# Altium PCB MainBoard.PcbDoc (part 4 of 5)
Units mm, origin at the board's own origin, x right, y up, seen from the top; angles counter-clockwise.
Board outline 82.15 x 81.5 mm, 4 copper layers (Top Layer, GND Top, GND Bot, Bottom Layer), stack 1.57 mm thick; 116 components, 97 nets, 468 pads, 3117 vias.
Unrouted connection lines stored in the file: 5.
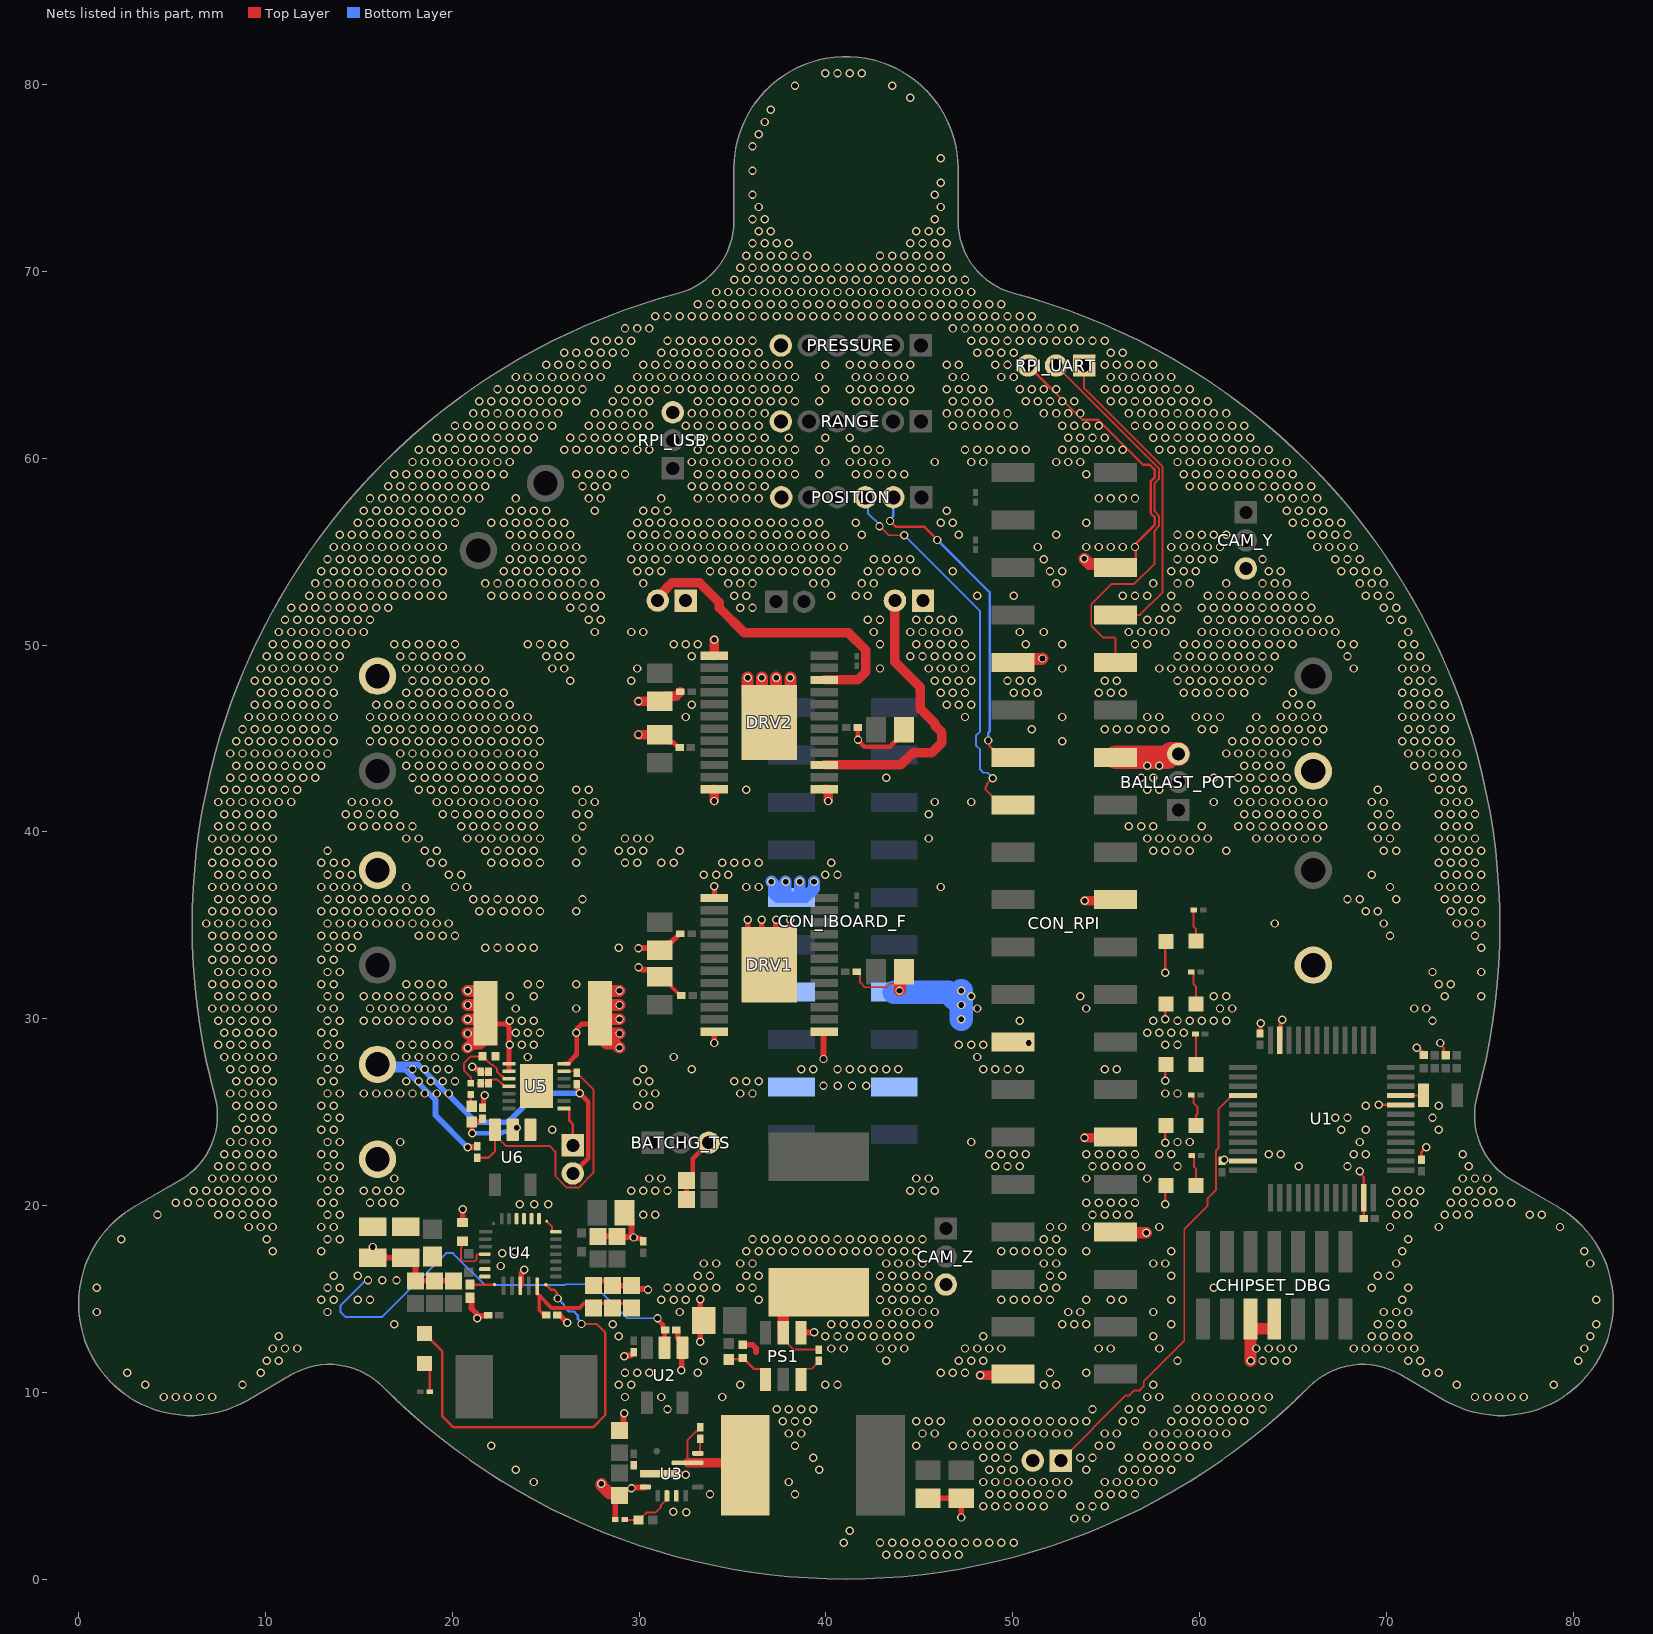
[diagram p5: the nets of this part, all layers, seen from the top]

## Via types
v1: diameter 0.45, hole 0.3, Top Layer to Bottom Layer, tented both sides, 3113 vias
v2: diameter 0.45, hole 0.3, Top Layer to Bottom Layer, 4 vias

## Nets (pads, with @x,y where several pads share a name; then routed paths per layer and width w, separated by ;. In a path a pad name is that pad's centre, name@x,y a point inside that pad or via, vN(x,y) a via of type N, cw(c..) or ccw(c..) an arc to the next point about the centre after c; other vN are vias at no path point) (continued)
GND: ACT.1 BALLAST_POT.3 BATCHG_TS.3 BATT.1 BUTTON_PWR.2 C1.2 C2.2 C3.2 C4.2 C5.1 C6.1 C7.2 C8.1 C10.1 C12.2 C13.2 C14.1 C15.2 C16.2 C17.2 C18.2 C19.2 C21.1 C22.1 C28.2 C29.1 C30.1 C31.1 C32.1 C33.1 C34.1 C42.1 C43.1 C44.1 C45.2 C46.1 C47.2 C48.1 C49.1 C50.1 C51.1 C53.1 C54.1 C55.1 C56.1 C59.1 CAM_Y.3 CAM_Z.3 CHIPSET_DBG.5 CHIPSET_DBG.7 CON_IBOARD_F.2 CON_IBOARD_F.4 CON_IBOARD_F.6 CON_IBOARD_F.17 CON_IBOARD_F.19 CON_RPI.6 CON_RPI.9 CON_RPI.14 CON_RPI.20 CON_RPI.25 CON_RPI.30 CON_RPI.34 CON_RPI.39 DRV1.1 DRV1.13 DRV1.24 DRV1.25 DRV2.1 DRV2.13 DRV2.24 DRV2.25 LAMP1.1 LAMP2.1 POSITION.6 PRESSURE.6 PS1.1 R2.2 R5.1 R9.1 R11.1 R13.1 R15.1 RANGE.6 REG5.1 REG12.1 REGPI.1 RPI_UART.3 RPI_USB.3 THRUSTER_BL.2 THRUSTER_BR.2 THRUSTER_FL.2 THRUSTER_FR.2 U1.8 U1.23 U1.35 U1.47 U2.1 U3.3 U3.9 U3.10 U4.10 U4.11 U4.12 U4.13 U4.27 U5.7 | length 149.3
  Top Layer w0.102: C29.1@41.656,32.512 41.702,32.512 41.832,32.381 41.832,31.948 42.096,31.685 43.272,31.685 43.475,31.888 43.71,31.888 C50.1@43.977,32.155
  Top Layer w0.127: RPI_UART.3@50.824,64.966 53.723,62.067 54.571,62.067 56.993,59.645 57.342,59.645 57.613,59.374 57.613,58.99 57.385,58.761 57.385,57.063 57.613,56.834 57.613,56.45 56.599,55.435 56.599,54.599 56.152,54.153 CON_RPI.6@55.512,54.153 ; v1(58.166,20.066) 58.166,21.008 ACT.1@58.221,21.062 ; v1(58.166,23.368) 58.166,24.233 REGPI.1@58.221,24.288 ; v1(58.166,26.67) 58.166,27.485 REG5.1@58.221,27.539 ; v1(58.166,29.972) 58.166,30.736 REG12.1@58.221,30.791 ; v1(58.166,32.468) 58.166,34.089 BATT.1@58.221,34.143 ; C2.2@61.214,22.402 61.228,22.388 C2.2@61.331,22.388 ; v1(61.331,22.448) C2.2@61.331,22.388 ; U1.35@62.332,22.388 C2.2@61.331,22.388 ; v1(68.58,21.844) 68.58,21.743 68.798,21.525 U1.47@68.798,20.422 68.798,19.318 C4.2@68.784,19.304 ; v1(69.596,25.4) 69.602,25.394 70.758,25.394 U1.8@70.764,25.388 ; v1(71.628,28.448) 71.699,28.377 71.82,28.377 72.136,28.061 R13.1@72.136,28.011 ; C1.2@71.882,22.453 71.882,22.86 v1(72.136,23.114) ; v1(72.898,28.702) 72.898,28.601 73.073,28.427 73.073,28.09 R11.1@73.152,28.011
  Top Layer w0.203: C49.1@31.115,32.246 31.265,32.246 31.688,31.823 31.688,31.766 32.212,31.242 C28.2@32.258,31.242 ; C3.2@63.246,29.21 63.265,29.229 63.265,29.737 v1(63.284,29.756) ; U1.23@64.298,28.854 64.336,28.892 64.336,29.748 64.443,29.855 v1(64.443,29.935)
  Top Layer w0.254: C21.1@15.748,17.204 v1(15.748,17.78) ; U5.7@25.986,27.591 26.182,27.591 26.651,28.06 26.651,28.158 26.67,28.177 26.67,29.464 26.924,29.718 27.584,29.718 R9.1@27.94,30.074 ; C55.1@31.115,45.2 31.513,44.802 31.841,44.802 32.128,44.516 C45.2@32.173,44.516 ; C46.1@32.546,20.32 C54.1@32.546,21.336 32.872,21.662 32.872,22.506 BATCHG_TS.3@33.734,23.368 ; DRV1.13@34.036,36.464 v1(34.036,37.084) ; v1@41.706,44.92 42.064,44.562 43.43,44.562 44.184,45.316 C56.1@44.184,45.466 ; C48.1@41.706,45.593 41.715,45.585 41.715,44.945 v1(41.723,44.937)
  Top Layer w0.305: C21.1@16.188,17.526 16.51,17.204 C22.1@17.526,17.204 17.701,17.204 18.034,16.871 C18.2@18.034,15.968 C17.2@19.05,15.968 C16.2@20.066,15.968 ; R2.2@20.557,19.095 20.566,19.103 20.566,19.804 v1(20.574,19.812) ; C19.2@20.955,15.063 21.034,14.985 21.034,14.607 21.038,14.604 21.038,14.484 21.299,14.223 21.299,14.007 v1(21.336,13.97) ; v1@21.512,14.093 21.892,14.093 C15.2@21.921,14.122 ; U4.27@23.647,15.699 23.7,15.751 23.7,16.348 23.854,16.503 v1(23.854,16.556) ; C13.2@25.636,14.139 25.665,14.11 25.768,14.11 v1(26.162,13.716) ; C8.1@27.559,15.714 27.813,15.968 28.575,15.968 28.829,15.714 C12.2@29.591,15.714 29.773,15.531 30.443,15.531 v1(30.48,15.494) ; C6.1@27.813,18.346 C5.1@28.829,18.346 28.858,18.317 v1@29.689,18.317 ; C33.1@28.691,4.215 C33.1@28.956,4.479 29.256,4.78 29.463,4.78 29.559,4.876 v1(29.598,4.876) ; R15.1@28.727,3.196 C33.1@28.727,4.179 ; C34.1@28.956,7.967 29.173,8.183 29.173,8.853 v1(29.21,8.89) ; v1(29.21,11.938) 29.247,11.975 29.552,11.975 29.643,12.067 29.689,12.067 29.718,12.096 C31.1@29.718,12.142 ; C14.1@29.225,19.609 29.6,19.234 29.6,18.459 29.718,18.341 v1(29.718,18.288) 29.755,18.251 30.06,18.251 30.151,18.159 30.197,18.159 30.226,18.13 C7.2@30.226,18.084 ; v1@29.598,4.931 29.626,4.903 29.665,4.903 30.32,4.904 U3.10@30.347,4.931 ; v1(29.972,32.766) 30.025,32.766 30.172,32.619 30.742,32.619 C49.1@31.115,32.246 ; v1(29.972,33.782) 31,33.782 C53.1@31.115,33.667 31.488,34.04 31.658,34.04 32.162,34.544 C42.1@32.208,34.544 ; U3.9@31.097,5.651 31.138,5.61 32.484,5.61 v1(32.511,5.583) ; C30.1@32.004,13.335 32.05,13.335 32.079,13.306 32.079,12.912 32.319,12.672 U2.1@32.319,12.397 32.289,12.367 32.289,11.207 v1(32.258,11.176) ; v1(33.274,12.7) 33.274,13.653 C47.2@33.464,13.843 33.274,14.033 v1(33.274,14.986) ; v1(34.036,28.702) DRV1.24@34.036,29.314 ; R5.1@35.56,12.542 36.08,12.542 36.258,12.363 36.258,12.163 ; v1(35.814,35.306) 35.814,34.049 DRV1.25@36.576,33.287 ; v1(36.576,35.306) DRV1.25@36.576,33.287 ; v1(37.338,35.306) DRV1.25@37.338,33.253 ; v1(38.1,35.306) 38.1,34.015 DRV1.25@37.338,33.253 ; PS1.1@38.669,13.188 38.689,13.208 v1(39.37,13.208) ; v1(39.878,27.845) 39.878,29.241 39.912,29.275 DRV1.1@39.912,29.314 ; C43.1@45.466,4.33 C44.1@47.244,4.33 v1(47.244,3.302) ; DRV1.25@36.576,33.287 DRV1.25@36.974,32.889 DRV1.25@37.338,33.253
  Top Layer w0.508: v1(29.972,45.212) 31.103,45.212 C55.1@31.115,45.2 ; v1(29.972,46.99) 31.103,46.99 C59.1@31.115,47.002 31.386,47.273 31.983,47.273 C51.1@32.208,47.498 ; v1(34.036,41.656) DRV2.24@34.036,42.283 ; DRV2.13@34.036,49.433 v1(34.036,50.292) ; DRV2.1@39.912,42.283 40.103,42.283 40.132,42.254 v1(40.132,41.656) ; v1(48.26,10.922) 49.962,10.922 CON_RPI.39@50.013,10.973 ; CON_RPI.25@50.013,28.753 50.063,28.702 v1(50.864,28.702) ; v1(53.848,23.622) 55.462,23.622 CON_RPI.30@55.512,23.673 ; v1(53.853,36.322) 55.462,36.322 CON_RPI.20@55.512,36.373
  Top Layer w0.635: v1(27.988,5.099) 27.988,5.032 28.448,4.572 ; v1(28.956,28.448) 28.741,28.663 28.264,28.663 27.94,28.987 R9.1@27.94,29.534 ; v1(28.956,29.21) 28.264,29.21 R9.1@27.94,29.534 ; v1(28.956,29.972) 28.042,29.972 R9.1@27.94,30.074 ; v1(28.956,30.734) 28.264,30.734 R9.1@27.94,30.41 ; v1(28.956,31.496) 28.944,31.484 28.264,31.484 27.94,31.16 R9.1@27.94,30.41 ; v1(35.814,48.26) 35.814,47.018 DRV2.25@36.576,46.256 ; v1(36.576,48.26) DRV2.25@36.576,46.256 ; v1(37.338,48.26) DRV2.25@37.338,46.222 ; v1(38.1,48.26) 38.1,46.984 DRV2.25@37.338,46.222 ; v1(43.942,31.496) 43.977,31.531 43.977,32.155 43.977,32.304 C50.1@44.184,32.512 ; CON_RPI.9@50.013,49.073 50.205,49.265 51.578,49.265 v1(51.596,49.283) ; v1(53.831,54.616) 54.102,54.345 55.32,54.345 CON_RPI.6@55.512,54.153 ; CON_RPI.34@55.512,18.593 55.563,18.542 v1(57.15,18.542) ; v1(62.738,11.684) 62.738,13.407 CHIPSET_DBG.7@64.008,13.407 ; R9.1@27.94,29.534 R9.1@27.94,30.074 ; R9.1@27.94,30.074 R9.1@27.94,30.41 ; DRV2.25@36.576,46.256 DRV2.25@36.974,45.858 DRV2.25@37.338,46.222
  Top Layer w1.27: CON_RPI.14@55.512,43.993 58.301,43.993 58.48,44.172 BALLAST_POT.3@58.87,44.172
  Bottom Layer w0.635: v1(37.084,37.338) 37.227,37.195 37.227,36.692 37.419,36.5 CON_IBOARD_F.6@38.038,36.5 ; v1(37.846,37.338) 37.846,36.692 CON_IBOARD_F.6@38.038,36.5 ; v1(38.608,37.338) 38.608,36.692 CON_IBOARD_F.6@38.416,36.5 ; v1(39.37,37.338) 39.37,36.971 38.899,36.5 CON_IBOARD_F.6@38.416,36.5 ; CON_IBOARD_F.6@38.038,36.5 CON_IBOARD_F.6@38.159,36.5 CON_IBOARD_F.6@38.416,36.5
  Bottom Layer w1.27: CON_IBOARD_F.17@43.659,31.42 46.558,31.42 46.863,31.115 ; v1(47.244,29.972) v1(47.244,31.496)
  other v1: 43.225,1.3 43.875,1.3 44.525,1.3 45.175,1.3 45.825,1.3 46.475,1.3 47.125,1.3 40.95,1.95 42.9,1.95 43.55,1.95 44.2,1.95 44.85,1.95 45.5,1.95 46.15,1.95 46.8,1.95 47.45,1.95 48.1,1.95 48.75,1.95 49.4,1.95 50.05,1.95 41.275,2.6 53.3,3.25 53.95,3.25 32.52,3.575 31.834,3.606 48.425,3.9 49.075,3.9 49.725,3.9 50.375,3.9 51.025,3.9 51.675,3.9 53.625,3.9 54.275,3.9 54.925,3.9 33.8,4.55 38.35,4.55 48.75,4.55 49.4,4.55 50.05,4.55 50.7,4.55 51.35,4.55 52,4.55 52.65,4.55 54.6,4.55 55.25,4.55 55.9,4.55 56.55,4.55 24.375,5.2 38.025,5.2 48.425,5.2 49.075,5.2 49.725,5.2 50.375,5.2 51.025,5.2 51.675,5.2 52.325,5.2 52.975,5.2 54.925,5.2 55.575,5.2 56.225,5.2 56.875,5.2 57.525,5.2 23.4,5.85 39.65,5.85 48.75,5.85 49.4,5.85 50.05,5.85 53.95,5.85 55.9,5.85 56.55,5.85 57.2,5.85 57.85,5.85 58.5,5.85 39.325,6.5 48.425,6.5 49.075,6.5 49.725,6.5 53.625,6.5 54.275,6.5 56.225,6.5 56.875,6.5 57.525,6.5 58.175,6.5 58.825,6.5 59.475,6.5 22.1,7.15 38.35,7.15 44.85,7.15 46.8,7.15 47.45,7.15 48.1,7.15 48.75,7.15 49.4,7.15 50.05,7.15 54.6,7.15 55.25,7.15 57.2,7.15 57.85,7.15 58.5,7.15 59.15,7.15 59.8,7.15 60.45,7.15 38.025,7.8 38.675,7.8 45.175,7.8 45.825,7.8 47.775,7.8 48.425,7.8 49.075,7.8 49.725,7.8 50.375,7.8 51.025,7.8 51.675,7.8 52.325,7.8 52.975,7.8 54.925,7.8 55.575,7.8 57.525,7.8 58.175,7.8 58.825,7.8 59.475,7.8 60.125,7.8 60.775,7.8 61.425,7.8 37.7,8.45 38.35,8.45 39,8.45 44.85,8.45 45.5,8.45 46.15,8.45 48.1,8.45 48.75,8.45 49.4,8.45 50.05,8.45 50.7,8.45 51.35,8.45 52,8.45 52.65,8.45 53.3,8.45 53.95,8.45 55.9,8.45 56.55,8.45 58.5,8.45 59.15,8.45 59.8,8.45 60.45,8.45 61.1,8.45 61.75,8.45 62.4,8.45 31.525,9.1 37.375,9.1 38.025,9.1 38.675,9.1 39.325,9.1 54.275,9.1 56.225,9.1 56.875,9.1 58.825,9.1 59.475,9.1 60.125,9.1 60.775,9.1 61.425,9.1 62.075,9.1 62.725,9.1 63.375,9.1 4.55,9.75 5.2,9.75 5.85,9.75 6.5,9.75 7.15,9.75 29.25,9.75 31.2,9.75 34.45,9.75 57.2,9.75 57.85,9.75 59.8,9.75 60.45,9.75 61.1,9.75 61.75,9.75 62.4,9.75 63.05,9.75 63.7,9.75 74.75,9.75 75.4,9.75 76.05,9.75 76.7,9.75 77.35,9.75 3.575,10.4 8.775,10.4 28.925,10.4 29.575,10.4 35.425,10.4 39.975,10.4 40.625,10.4 51.675,10.4 52.325,10.4 57.525,10.4 73.775,10.4 78.975,10.4 2.6,11.05 9.75,11.05 29.25,11.05 29.9,11.05 30.55,11.05 33.15,11.05 46.15,11.05 46.8,11.05 47.45,11.05 52,11.05 53.95,11.05 72.15,11.05 72.8,11.05 10.075,11.7 10.725,11.7 33.475,11.7 43.225,11.7 47.125,11.7 47.775,11.7 48.425,11.7 58.825,11.7 63.375,11.7 64.025,11.7 64.675,11.7 71.175,11.7 71.825,11.7 80.275,11.7 10.4,12.35 11.05,12.35 11.7,12.35 40.3,12.35 40.95,12.35 42.9,12.35 43.55,12.35 44.2,12.35 47.45,12.35 48.1,12.35 48.75,12.35 49.4,12.35 54.6,12.35 55.25,12.35 57.85,12.35 63.05,12.35 63.7,12.35 64.35,12.35 65,12.35 68.25,12.35 68.9,12.35 69.55,12.35 70.2,12.35 70.85,12.35 71.5,12.35 80.6,12.35 10.725,13 28.925,13 39.975,13 40.625,13 41.275,13 41.925,13 42.575,13 43.225,13 43.875,13 44.525,13 48.425,13 57.525,13 69.225,13 69.875,13 70.525,13 71.175,13 80.925,13 16.9,13.65 28.6,13.65 40.3,13.65 40.95,13.65 41.6,13.65 42.25,13.65 42.9,13.65 43.55,13.65 44.2,13.65 44.85,13.65 45.5,13.65 52.65,13.65 53.3,13.65 53.95,13.65 58.5,13.65 69.55,13.65 70.2,13.65 70.85,13.65 81.25,13.65 0.975,14.3 13.325,14.3 32.175,14.3 43.225,14.3 43.875,14.3 44.525,14.3 45.175,14.3 45.825,14.3 52.975,14.3 53.625,14.3 57.525,14.3 69.875,14.3 70.525,14.3 71.175,14.3 13,14.95 13.65,14.95 14.95,14.95 15.6,14.95 31.2,14.95 31.85,14.95 32.5,14.95 36.4,14.95 42.9,14.95 43.55,14.95 44.2,14.95 44.85,14.95 45.5,14.95 49.4,14.95 50.05,14.95 50.7,14.95 51.35,14.95 52,14.95 53.95,14.95 55.25,14.95 55.9,14.95 58.5,14.95 70.85,14.95 81.25,14.95 0.975,15.6 13.325,15.6 13.975,15.6 31.525,15.6 32.175,15.6 32.825,15.6 33.475,15.6 34.125,15.6 35.425,15.6 36.075,15.6 43.225,15.6 43.875,15.6 44.525,15.6 45.175,15.6 51.675,15.6 52.325,15.6 60.775,15.6 69.225,15.6 71.175,15.6 13.65,16.25 33.15,16.25 33.8,16.25 35.75,16.25 36.4,16.25 42.9,16.25 43.55,16.25 44.2,16.25 44.85,16.25 45.5,16.25 52,16.25 52.65,16.25 58.5,16.25 69.55,16.25 70.2,16.25 33.475,16.9 34.125,16.9 35.425,16.9 36.075,16.9 43.225,16.9 43.875,16.9 44.525,16.9 45.175,16.9 51.675,16.9 52.325,16.9 57.525,16.9 58.175,16.9 70.525,16.9 80.925,16.9 10.4,17.55 13,17.55 35.75,17.55 36.4,17.55 37.05,17.55 37.7,17.55 38.35,17.55 39,17.55 39.65,17.55 40.3,17.55 40.95,17.55 41.6,17.55 42.25,17.55 42.9,17.55 43.55,17.55 44.2,17.55 44.85,17.55 49.4,17.55 50.05,17.55 50.7,17.55 51.35,17.55 52,17.55 52.65,17.55 53.95,17.55 58.5,17.55 70.85,17.55 80.6,17.55 2.275,18.2 10.075,18.2 13.325,18.2 13.975,18.2 36.075,18.2 36.725,18.2 37.375,18.2 38.025,18.2 38.675,18.2 39.325,18.2 39.975,18.2 40.625,18.2 41.275,18.2 41.925,18.2 42.575,18.2 43.225,18.2 43.875,18.2 44.525,18.2 45.175,18.2 51.675,18.2 52.325,18.2 71.175,18.2 9.1,18.85 9.75,18.85 10.4,18.85 13,18.85 13.65,18.85 52,18.85 52.65,18.85 53.95,18.85 57.85,18.85 70.2,18.85 72.8,18.85 79.3,18.85 4.225,19.5 7.475,19.5 8.125,19.5 8.775,19.5 9.425,19.5 10.075,19.5 13.325,19.5 13.975,19.5 30.225,19.5 30.875,19.5 54.275,19.5 54.925,19.5 55.575,19.5 56.225,19.5 70.525,19.5 71.175,19.5 73.125,19.5 73.775,19.5 74.425,19.5 77.675,19.5 78.325,19.5 23.622,20.066 24.384,20.066 25.146,20.066 5.2,20.15 5.85,20.15 6.5,20.15 7.15,20.15 7.8,20.15 8.45,20.15 9.1,20.15 9.75,20.15 10.4,20.15 13,20.15 13.65,20.15 53.95,20.15 54.6,20.15 55.25,20.15 55.9,20.15 56.55,20.15 70.2,20.15 70.85,20.15 71.5,20.15 73.45,20.15 74.1,20.15 74.75,20.15 75.4,20.15 76.05,20.15 76.7,20.15 6.175,20.8 6.825,20.8 7.475,20.8 8.125,20.8 8.775,20.8 9.425,20.8 10.075,20.8 13.325,20.8 13.975,20.8 29.575,20.8 30.225,20.8 30.875,20.8 31.525,20.8 44.525,20.8 45.175,20.8 45.825,20.8 70.525,20.8 71.175,20.8 71.825,20.8 73.775,20.8 74.425,20.8 75.075,20.8 75.725,20.8 7.15,21.45 7.8,21.45 8.45,21.45 9.1,21.45 9.75,21.45 10.4,21.45 13,21.45 13.65,21.45 30.55,21.45 31.2,21.45 44.85,21.45 45.5,21.45 53.95,21.45 57.2,21.45 74.1,21.45 74.75,21.45 75.4,21.45 7.475,22.1 8.125,22.1 8.775,22.1 9.425,22.1 10.075,22.1 13.325,22.1 13.975,22.1 49.075,22.1 49.725,22.1 50.375,22.1 54.275,22.1 54.925,22.1 55.575,22.1 56.225,22.1 56.875,22.1 58.825,22.1 65.325,22.1 67.925,22.1 74.425,22.1 7.8,22.75 8.45,22.75 9.1,22.75 9.75,22.75 10.4,22.75 13,22.75 13.65,22.75 48.75,22.75 49.4,22.75 50.05,22.75 50.7,22.75 53.95,22.75 54.6,22.75 55.25,22.75 55.9,22.75 56.55,22.75 57.85,22.75 58.5,22.75 63.7,22.75 64.35,22.75 68.25,22.75 68.9,22.75 74.1,22.75 8.125,23.4 8.775,23.4 9.425,23.4 10.075,23.4 13.325,23.4 13.975,23.4 47.775,23.4 58.825,23.4 59.475,23.4 68.575,23.4 8.45,24.05 9.1,24.05 9.75,24.05 10.4,24.05 13,24.05 13.65,24.05 25.35,24.05 67.6,24.05 68.9,24.05 72.8,24.05 8.775,24.7 9.425,24.7 10.075,24.7 13.325,24.7 13.975,24.7 67.275,24.7 67.925,24.7 72.475,24.7 8.45,25.35 9.1,25.35 9.75,25.35 10.4,25.35 13,25.35 13.65,25.35 29.9,25.35 30.55,25.35 68.9,25.35 72.8,25.35 8.125,26 8.775,26 9.425,26 10.075,26 13.325,26 13.975,26 30.225,26 30.875,26 35.425,26 36.075,26 58.175,26 58.825,26 39.878,26.416 40.64,26.416 41.402,26.416 42.164,26.416 8.45,26.65 9.1,26.65 9.75,26.65 10.4,26.65 13,26.65 13.65,26.65 29.9,26.65 30.55,26.65 35.1,26.65 35.75,26.65 36.4,26.65 8.125,27.3 8.775,27.3 9.425,27.3 10.075,27.3 13.325,27.3 13.975,27.3 30.225,27.3 32.825,27.3 38.675,27.3 39.325,27.3 40.625,27.3 41.275,27.3 41.925,27.3 42.575,27.3 43.225,27.3 43.875,27.3 48.425,27.3 49.075,27.3 49.725,27.3 50.375,27.3 54.925,27.3 55.575,27.3 7.8,27.95 8.45,27.95 9.1,27.95 9.75,27.95 10.4,27.95 13,27.95 13.65,27.95 31.85,27.95 48.1,27.95 7.475,28.6 8.125,28.6 8.775,28.6 9.425,28.6 10.075,28.6 13.325,28.6 13.975,28.6 47.125,28.6 47.775,28.6 48.425,28.6 58.175,28.6 58.825,28.6 7.8,29.25 8.45,29.25 9.1,29.25 9.75,29.25 10.4,29.25 13,29.25 13.65,29.25 26.65,29.25 57.2,29.25 57.85,29.25 58.5,29.25 59.15,29.25 7.475,29.9 8.125,29.9 8.775,29.9 9.425,29.9 10.075,29.9 13.325,29.9 13.975,29.9 15.275,29.9 15.925,29.9 16.575,29.9 17.225,29.9 17.875,29.9 18.525,29.9 19.175,29.9 19.825,29.9 50.375,29.9 57.525,29.9 58.825,29.9 59.475,29.9 60.125,29.9 60.775,29.9 61.425,29.9 72.475,29.9 7.15,30.55 7.8,30.55 8.45,30.55 9.1,30.55 9.75,30.55 10.4,30.55 13,30.55 13.65,30.55 15.6,30.55 16.25,30.55 16.9,30.55 17.55,30.55 18.2,30.55 18.85,30.55 19.5,30.55 26.65,30.55 48.1,30.55 53.95,30.55 61.1,30.55 61.75,30.55 71.5,30.55 72.15,30.55 47.244,30.734 7.475,31.2 8.125,31.2 8.775,31.2 9.425,31.2 10.075,31.2 13.325,31.2 13.975,31.2 15.275,31.2 15.925,31.2 16.575,31.2 17.225,31.2 17.875,31.2 18.525,31.2 19.175,31.2 19.825,31.2 24.375,31.2 47.775,31.2 53.625,31.2 60.775,31.2 61.425,31.2 73.125,31.2 75.075,31.2 7.15,31.85 7.8,31.85 8.45,31.85 9.1,31.85 9.75,31.85 10.4,31.85 13,31.85 13.65,31.85 17.55,31.85 18.2,31.85 18.85,31.85 19.5,31.85 24.05,31.85 24.7,31.85 26.65,31.85 72.8,31.85 73.45,31.85 7.475,32.5 8.125,32.5 8.775,32.5 9.425,32.5 10.075,32.5 13.325,32.5 13.975,32.5 72.475,32.5 75.075,32.5 7.15,33.15 7.8,33.15 8.45,33.15 9.1,33.15 9.75,33.15 10.4,33.15 13,33.15 13.65,33.15 7.475,33.8 8.125,33.8 8.775,33.8 9.425,33.8 10.075,33.8 13.325,33.8 13.975,33.8 14.625,33.8 21.775,33.8 22.425,33.8 23.075,33.8 23.725,33.8 24.375,33.8 28.925,33.8 75.075,33.8 7.15,34.45 7.8,34.45 8.45,34.45 9.1,34.45 9.75,34.45 10.4,34.45 13,34.45 13.65,34.45 14.3,34.45 14.95,34.45 18.2,34.45 18.85,34.45 19.5,34.45 20.15,34.45 70.2,34.45 74.75,34.45 6.825,35.1 7.475,35.1 8.125,35.1 8.775,35.1 9.425,35.1 10.075,35.1 13.325,35.1 13.975,35.1 14.625,35.1 15.275,35.1 15.925,35.1 16.575,35.1 17.225,35.1 17.875,35.1 18.525,35.1 19.175,35.1 19.825,35.1 64.025,35.1 69.875,35.1 73.775,35.1 74.425,35.1 75.075,35.1 7.15,35.75 7.8,35.75 8.45,35.75 9.1,35.75 9.75,35.75 10.4,35.75 13,35.75 13.65,35.75 14.3,35.75 14.95,35.75 15.6,35.75 16.25,35.75 16.9,35.75 17.55,35.75 18.2,35.75 18.85,35.75 21.45,35.75 22.1,35.75 22.75,35.75 23.4,35.75 24.05,35.75 24.7,35.75 26.65,35.75 68.9,35.75 69.55,35.75 73.45,35.75 74.1,35.75 74.75,35.75 7.475,36.4 8.125,36.4 8.775,36.4 9.425,36.4 10.075,36.4 13.325,36.4 13.975,36.4 14.625,36.4 15.275,36.4 15.925,36.4 16.575,36.4 17.225,36.4 17.875,36.4 18.525,36.4 21.125,36.4 21.775,36.4 22.425,36.4 23.075,36.4 23.725,36.4 24.375,36.4 26.975,36.4 67.925,36.4 68.575,36.4 70.525,36.4 73.125,36.4 73.775,36.4 74.425,36.4 75.075,36.4 7.15,37.05 7.8,37.05 8.45,37.05 9.1,37.05 9.75,37.05 10.4,37.05 13,37.05 13.65,37.05 14.3,37.05 14.95,37.05 17.55,37.05 20.15,37.05 20.8,37.05 35.75,37.05 36.4,37.05 46.15,37.05 70.2,37.05 72.8,37.05 73.45,37.05 74.1,37.05 74.75,37.05 7.475,37.7 8.125,37.7 8.775,37.7 9.425,37.7 10.075,37.7 13.325,37.7 13.975,37.7 14.625,37.7 19.825,37.7 20.475,37.7 33.475,37.7 34.125,37.7 34.775,37.7 39.975,37.7 40.625,37.7 69.225,37.7 73.125,37.7 73.775,37.7 74.425,37.7 75.075,37.7 7.15,38.35 7.8,38.35 8.45,38.35 9.1,38.35 9.75,38.35 10.4,38.35 13,38.35 13.65,38.35 14.3,38.35 18.85,38.35 19.5,38.35 22.1,38.35 22.75,38.35 23.4,38.35 24.05,38.35 24.7,38.35 26.65,38.35 29.25,38.35 29.9,38.35 31.2,38.35 31.85,38.35 34.45,38.35 35.1,38.35 35.75,38.35 36.4,38.35 40.3,38.35 72.8,38.35 73.45,38.35 74.1,38.35 74.75,38.35 7.475,39 8.125,39 8.775,39 9.425,39 10.075,39 13.325,39 18.525,39 19.175,39 21.775,39 22.425,39 23.075,39 23.725,39 24.375,39 26.975,39 28.925,39 29.575,39 30.225,39 32.175,39 57.525,39 58.175,39 58.825,39 59.475,39 61.425,39 69.875,39 70.525,39 73.125,39 73.775,39 74.425,39 75.075,39 7.15,39.65 7.8,39.65 8.45,39.65 9.1,39.65 9.75,39.65 10.4,39.65 17.55,39.65 18.2,39.65 20.8,39.65 21.45,39.65 22.1,39.65 22.75,39.65 23.4,39.65 24.05,39.65 24.7,39.65 26.65,39.65 29.25,39.65 29.9,39.65 30.55,39.65 45.5,39.65 57.2,39.65 57.85,39.65 58.5,39.65 59.15,39.65 59.8,39.65 60.45,39.65 63.05,39.65 63.7,39.65 64.35,39.65 65,39.65 65.65,39.65 66.3,39.65 69.55,39.65 70.2,39.65 72.8,39.65 73.45,39.65 74.1,39.65 74.75,39.65 7.475,40.3 8.125,40.3 8.775,40.3 9.425,40.3 10.075,40.3 14.625,40.3 15.275,40.3 15.925,40.3 16.575,40.3 17.225,40.3 17.875,40.3 20.475,40.3 21.125,40.3 21.775,40.3 22.425,40.3 23.075,40.3 23.725,40.3 24.375,40.3 26.975,40.3 56.225,40.3 56.875,40.3 57.525,40.3 60.125,40.3 62.075,40.3 62.725,40.3 63.375,40.3 64.025,40.3 64.675,40.3 65.325,40.3 65.975,40.3 66.625,40.3 69.225,40.3 69.875,40.3 70.525,40.3 73.125,40.3 73.775,40.3 74.425,40.3 7.8,40.95 8.45,40.95 9.1,40.95 9.75,40.95 10.4,40.95 14.3,40.95 14.95,40.95 15.6,40.95 16.25,40.95 16.9,40.95 19.5,40.95 20.15,40.95 20.8,40.95 21.45,40.95 22.1,40.95 22.75,40.95 23.4,40.95 24.05,40.95 24.7,40.95 26.65,40.95 27.3,40.95 45.5,40.95 62.4,40.95 63.05,40.95 63.7,40.95 64.35,40.95 65,40.95 65.65,40.95 66.3,40.95 69.55,40.95 70.2,40.95 72.8,40.95 73.45,40.95 74.1,40.95 74.75,40.95 7.475,41.6 8.125,41.6 8.775,41.6 9.425,41.6 10.075,41.6 10.725,41.6 11.375,41.6 14.625,41.6 15.275,41.6 15.925,41.6 16.575,41.6 19.175,41.6 19.825,41.6 20.475,41.6 21.125,41.6 21.775,41.6 22.425,41.6 23.075,41.6 23.725,41.6 24.375,41.6 26.975,41.6 27.625,41.6 45.825,41.6 47.775,41.6 60.775,41.6 62.075,41.6 62.725,41.6 63.375,41.6 64.025,41.6 64.675,41.6 65.325,41.6 65.975,41.6 66.625,41.6 69.225,41.6 69.875,41.6 73.125,41.6 73.775,41.6 74.425,41.6 7.8,42.25 8.45,42.25 9.1,42.25 9.75,42.25 10.4,42.25 11.05,42.25 11.7,42.25 18.2,42.25 18.85,42.25 19.5,42.25 20.15,42.25 20.8,42.25 21.45,42.25 22.1,42.25 22.75,42.25 23.4,42.25 24.05,42.25 24.7,42.25 26.65,42.25 27.3,42.25 35.75,42.25 57.2,42.25 57.85,42.25 62.4,42.25 63.05,42.25 63.7,42.25 64.35,42.25 65,42.25 69.55,42.25 72.8,42.25 73.45,42.25 74.1,42.25 8.125,42.9 8.775,42.9 9.425,42.9 10.075,42.9 10.725,42.9 11.375,42.9 12.025,42.9 12.675,42.9 17.875,42.9 18.525,42.9 19.175,42.9 19.825,42.9 20.475,42.9 21.125,42.9 21.775,42.9 22.425,42.9 23.075,42.9 23.725,42.9 24.375,42.9 43.225,42.9 56.875,42.9 57.525,42.9 60.775,42.9 62.075,42.9 62.725,42.9 63.375,42.9 64.025,42.9 64.675,42.9 72.475,42.9 73.125,42.9 73.775,42.9 8.45,43.55 9.1,43.55 9.75,43.55 10.4,43.55 11.05,43.55 11.7,43.55 12.35,43.55 13,43.55 17.55,43.55 18.2,43.55 18.85,43.55 19.5,43.55 20.15,43.55 20.8,43.55 21.45,43.55 22.1,43.55 22.75,43.55 23.4,43.55 24.05,43.55 24.7,43.55 57.2,43.55 57.85,43.55 62.4,43.55 63.05,43.55 63.7,43.55 64.35,43.55 71.5,43.55 72.15,43.55 72.8,43.55 73.45,43.55 74.1,43.55 8.125,44.2 8.775,44.2 9.425,44.2 10.075,44.2 10.725,44.2 11.375,44.2 12.025,44.2 12.675,44.2 13.325,44.2 17.225,44.2 17.875,44.2 18.525,44.2 19.175,44.2 19.825,44.2 20.475,44.2 21.125,44.2 21.775,44.2 22.425,44.2 23.075,44.2 23.725,44.2 24.375,44.2 61.425,44.2 62.075,44.2 62.725,44.2 63.375,44.2 64.025,44.2 64.675,44.2 71.175,44.2 71.825,44.2 72.475,44.2 73.125,44.2 73.775,44.2 8.45,44.85 9.1,44.85 9.75,44.85 10.4,44.85 11.05,44.85 11.7,44.85 12.35,44.85 13,44.85 13.65,44.85 15.6,44.85 16.25,44.85 16.9,44.85 17.55,44.85 18.2,44.85 18.85,44.85 19.5,44.85 20.15,44.85 20.8,44.85 21.45,44.85 22.1,44.85 22.75,44.85 23.4,44.85 24.05,44.85 24.7,44.85 52.65,44.85 61.75,44.85 62.4,44.85 63.05,44.85 63.7,44.85 64.35,44.85 65,44.85 65.65,44.85 66.3,44.85 70.85,44.85 71.5,44.85 72.15,44.85 72.8,44.85 73.45,44.85 8.775,45.5 9.425,45.5 10.075,45.5 10.725,45.5 11.375,45.5 12.025,45.5 12.675,45.5 13.325,45.5 15.925,45.5 16.575,45.5 17.225,45.5 17.875,45.5 18.525,45.5 19.175,45.5 19.825,45.5 20.475,45.5 21.125,45.5 21.775,45.5 22.425,45.5 23.075,45.5 23.725,45.5 24.375,45.5 51.025,45.5 54.925,45.5 55.575,45.5 56.225,45.5 56.875,45.5 57.525,45.5 58.175,45.5 60.125,45.5 60.775,45.5 62.725,45.5 63.375,45.5 64.025,45.5 64.675,45.5 65.325,45.5 65.975,45.5 66.625,45.5 71.175,45.5 71.825,45.5 72.475,45.5 73.125,45.5 9.1,46.15 9.75,46.15 10.4,46.15 11.05,46.15 11.7,46.15 12.35,46.15 13,46.15 13.65,46.15 15.6,46.15 16.25,46.15 16.9,46.15 17.55,46.15 18.2,46.15 18.85,46.15 19.5,46.15 20.15,46.15 20.8,46.15 21.45,46.15 22.1,46.15 22.75,46.15 23.4,46.15 24.05,46.15 32.5,46.15 47.45,46.15 52.65,46.15 57.2,46.15 57.85,46.15 59.8,46.15 60.45,46.15 61.1,46.15 63.05,46.15 64.35,46.15 65,46.15 65.65,46.15 66.3,46.15 70.85,46.15 71.5,46.15 72.15,46.15 72.8,46.15 73.45,46.15 9.425,46.8 10.075,46.8 10.725,46.8 11.375,46.8 12.025,46.8 12.675,46.8 13.325,46.8 15.925,46.8 16.575,46.8 17.225,46.8 17.875,46.8 18.525,46.8 19.175,46.8 19.825,46.8 20.475,46.8 21.125,46.8 21.775,46.8 22.425,46.8 23.075,46.8 32.825,46.8 46.475,46.8 47.125,46.8 47.775,46.8 64.675,46.8 65.325,46.8 65.975,46.8 71.175,46.8 71.825,46.8 72.475,46.8 73.125,46.8 9.75,47.45 10.4,47.45 11.05,47.45 11.7,47.45 12.35,47.45 13,47.45 13.65,47.45 17.55,47.45 18.2,47.45 18.85,47.45 19.5,47.45 20.15,47.45 20.8,47.45 21.45,47.45 22.1,47.45 22.75,47.45 46.15,47.45 46.8,47.45 47.45,47.45 50.05,47.45 50.7,47.45 51.35,47.45 54.6,47.45 55.25,47.45 55.9,47.45 59.15,47.45 59.8,47.45 60.45,47.45 61.1,47.45 61.75,47.45 62.4,47.45 65,47.45 70.85,47.45 71.5,47.45 72.15,47.45 72.8,47.45 9.425,48.1 10.075,48.1 10.725,48.1 11.375,48.1 12.025,48.1 12.675,48.1 13.325,48.1 17.875,48.1 18.525,48.1 19.175,48.1 19.825,48.1 20.475,48.1 21.125,48.1 21.775,48.1 26.325,48.1 29.575,48.1 45.825,48.1 46.475,48.1 47.125,48.1 47.775,48.1 49.725,48.1 50.375,48.1 51.025,48.1 54.925,48.1 55.575,48.1 58.825,48.1 59.475,48.1 60.125,48.1 60.775,48.1 61.425,48.1 62.075,48.1 62.725,48.1 63.375,48.1 71.175,48.1 71.825,48.1 72.475,48.1 9.75,48.75 10.4,48.75 11.05,48.75 11.7,48.75 12.35,48.75 13,48.75 13.65,48.75 17.55,48.75 18.2,48.75 18.85,48.75 19.5,48.75 20.15,48.75 20.8,48.75 21.45,48.75 25.35,48.75 26,48.75 29.9,48.75 42.9,48.75 45.5,48.75 46.15,48.75 46.8,48.75 47.45,48.75 52.65,48.75 57.85,48.75 58.5,48.75 59.15,48.75 59.8,48.75 60.45,48.75 61.1,48.75 61.75,48.75 62.4,48.75 63.05,48.75 63.7,48.75 68.25,48.75 70.85,48.75 71.5,48.75 72.15,48.75 10.075,49.4 10.725,49.4 11.375,49.4 12.025,49.4 12.675,49.4 13.325,49.4 13.975,49.4 17.225,49.4 17.875,49.4 18.525,49.4 19.175,49.4 19.825,49.4 20.475,49.4 25.025,49.4 25.675,49.4 26.325,49.4 32.825,49.4 44.525,49.4 45.175,49.4 45.825,49.4 46.475,49.4 47.125,49.4 47.775,49.4 58.825,49.4 59.475,49.4 60.125,49.4 60.775,49.4 61.425,49.4 62.075,49.4 62.725,49.4 63.375,49.4 64.025,49.4 67.925,49.4 71.175,49.4 71.825,49.4 10.4,50.05 11.05,50.05 11.7,50.05 12.35,50.05 13,50.05 13.65,50.05 14.3,50.05 16.9,50.05 17.55,50.05 18.2,50.05 18.85,50.05 19.5,50.05 20.15,50.05 24.05,50.05 24.7,50.05 25.35,50.05 26,50.05 31.85,50.05 32.5,50.05 33.15,50.05 42.9,50.05 44.85,50.05 45.5,50.05 46.15,50.05 46.8,50.05 47.45,50.05 50.7,50.05 52.65,50.05 56.55,50.05 57.2,50.05 59.15,50.05 59.8,50.05 60.45,50.05 61.1,50.05 61.75,50.05 62.4,50.05 63.05,50.05 63.7,50.05 64.35,50.05 65,50.05 67.6,50.05 68.25,50.05 70.85,50.05 71.5,50.05 10.725,50.7 11.375,50.7 12.025,50.7 12.675,50.7 13.325,50.7 13.975,50.7 14.625,50.7 15.275,50.7 27.625,50.7 29.575,50.7 30.225,50.7 42.575,50.7 44.525,50.7 45.175,50.7 45.825,50.7 46.475,50.7 47.125,50.7 50.375,50.7 51.675,50.7 56.225,50.7 56.875,50.7 57.525,50.7 58.175,50.7 60.125,50.7 60.775,50.7 61.425,50.7 62.075,50.7 62.725,50.7 63.375,50.7 64.025,50.7 64.675,50.7 65.325,50.7 65.975,50.7 66.625,50.7 67.275,50.7 71.175,50.7 11.05,51.35 11.7,51.35 12.35,51.35 13,51.35 13.65,51.35 14.3,51.35 14.95,51.35 15.6,51.35 27.3,51.35 27.95,51.35 42.25,51.35 42.9,51.35 44.85,51.35 45.5,51.35 46.15,51.35 46.8,51.35 57.2,51.35 57.85,51.35 58.5,51.35 60.45,51.35 61.1,51.35 61.75,51.35 62.4,51.35 63.05,51.35 63.7,51.35 64.35,51.35 65,51.35 65.65,51.35 66.3,51.35 66.95,51.35 70.2,51.35 70.85,51.35 11.375,52 12.025,52 12.675,52 13.325,52 13.975,52 14.625,52 15.275,52 15.925,52 16.575,52 26.325,52 26.975,52 27.625,52 35.425,52 36.075,52 58.175,52 58.825,52 60.125,52 60.775,52 61.425,52 62.075,52 62.725,52 63.375,52 64.025,52 64.675,52 65.325,52 65.975,52 69.875,52 70.525,52 12.35,52.65 13,52.65 13.65,52.65 14.3,52.65 14.95,52.65 15.6,52.65 16.25,52.65 16.9,52.65 17.55,52.65 18.2,52.65 18.85,52.65 19.5,52.65 22.1,52.65 22.75,52.65 23.4,52.65 24.05,52.65 24.7,52.65 25.35,52.65 26,52.65 26.65,52.65 27.3,52.65 27.95,52.65 35.1,52.65 35.75,52.65 40.3,52.65 41.6,52.65 42.25,52.65 48.1,52.65 50.05,52.65 55.9,52.65 56.55,52.65 57.2,52.65 58.5,52.65 60.45,52.65 61.1,52.65 61.75,52.65 62.4,52.65 63.05,52.65 63.7,52.65 64.35,52.65 65,52.65 65.65,52.65 68.9,52.65 69.55,52.65 70.2,52.65 12.675,53.3 13.325,53.3 13.975,53.3 14.625,53.3 15.275,53.3 15.925,53.3 16.575,53.3 17.225,53.3 17.875,53.3 18.525,53.3 19.175,53.3 21.775,53.3 22.425,53.3 23.075,53.3 23.725,53.3 24.375,53.3 25.025,53.3 25.675,53.3 26.325,53.3 26.975,53.3 27.625,53.3 30.225,53.3 34.775,53.3 35.425,53.3 36.075,53.3 39.325,53.3 39.975,53.3 41.925,53.3 42.575,53.3 52.325,53.3 57.525,53.3 58.825,53.3 59.475,53.3 61.425,53.3 63.375,53.3 64.025,53.3 64.675,53.3 68.575,53.3 69.225,53.3 69.875,53.3 13,53.95 13.65,53.95 14.3,53.95 14.95,53.95 15.6,53.95 16.25,53.95 16.9,53.95 17.55,53.95 18.2,53.95 18.85,53.95 19.5,53.95 22.75,53.95 23.4,53.95 24.05,53.95 24.7,53.95 25.35,53.95 26,53.95 26.65,53.95 29.9,53.95 30.55,53.95 31.2,53.95 33.8,53.95 34.45,53.95 35.1,53.95 35.75,53.95 36.4,53.95 37.05,53.95 37.7,53.95 38.35,53.95 39,53.95 39.65,53.95 40.3,53.95 42.25,53.95 42.9,53.95 43.55,53.95 44.2,53.95 44.85,53.95 46.8,53.95 52,53.95 52.65,53.95 58.5,53.95 59.15,53.95 59.8,53.95 63.7,53.95 64.35,53.95 67.6,53.95 68.25,53.95 68.9,53.95 69.55,53.95 13.325,54.6 13.975,54.6 14.625,54.6 15.275,54.6 15.925,54.6 16.575,54.6 17.225,54.6 17.875,54.6 18.525,54.6 19.175,54.6 23.075,54.6 23.725,54.6 24.375,54.6 25.025,54.6 25.675,54.6 26.325,54.6 26.975,54.6 29.575,54.6 30.225,54.6 30.875,54.6 31.525,54.6 32.175,54.6 32.825,54.6 33.475,54.6 34.125,54.6 34.775,54.6 35.425,54.6 36.075,54.6 36.725,54.6 37.375,54.6 38.025,54.6 38.675,54.6 39.325,54.6 39.975,54.6 40.625,54.6 42.575,54.6 43.225,54.6 43.875,54.6 44.525,54.6 51.675,54.6 58.825,54.6 59.475,54.6 60.125,54.6 60.775,54.6 63.375,54.6 67.275,54.6 67.925,54.6 68.575,54.6 13.65,55.25 14.3,55.25 14.95,55.25 15.6,55.25 16.25,55.25 16.9,55.25 17.55,55.25 18.2,55.25 18.85,55.25 19.5,55.25 23.4,55.25 24.05,55.25 24.7,55.25 25.35,55.25 26,55.25 26.65,55.25 29.9,55.25 30.55,55.25 31.2,55.25 31.85,55.25 32.5,55.25 33.15,55.25 33.8,55.25 34.45,55.25 35.1,55.25 35.75,55.25 36.4,55.25 37.05,55.25 37.7,55.25 38.35,55.25 39,55.25 39.65,55.25 40.3,55.25 40.95,55.25 51.35,55.25 53.95,55.25 54.6,55.25 55.25,55.25 55.9,55.25 56.55,55.25 58.5,55.25 59.15,55.25 59.8,55.25 60.45,55.25 61.1,55.25 66.3,55.25 66.95,55.25 67.6,55.25 68.25,55.25 13.975,55.9 14.625,55.9 15.275,55.9 15.925,55.9 16.575,55.9 17.225,55.9 17.875,55.9 18.525,55.9 19.175,55.9 23.075,55.9 23.725,55.9 24.375,55.9 25.025,55.9 25.675,55.9 26.325,55.9 29.575,55.9 30.225,55.9 30.875,55.9 31.525,55.9 32.175,55.9 32.825,55.9 33.475,55.9 34.125,55.9 34.775,55.9 35.425,55.9 36.075,55.9 36.725,55.9 37.375,55.9 38.025,55.9 38.675,55.9 39.325,55.9 39.975,55.9 41.925,55.9 47.125,55.9 52.325,55.9 58.825,55.9 59.475,55.9 60.125,55.9 60.775,55.9 61.425,55.9 65.975,55.9 66.625,55.9 67.275,55.9 67.925,55.9 14.95,56.55 15.6,56.55 16.25,56.55 16.9,56.55 17.55,56.55 18.2,56.55 18.85,56.55 19.5,56.55 20.15,56.55 22.1,56.55 22.75,56.55 23.4,56.55 24.05,56.55 24.7,56.55 25.35,56.55 26,56.55 29.9,56.55 30.55,56.55 31.2,56.55 31.85,56.55 32.5,56.55 33.15,56.55 33.8,56.55 34.45,56.55 35.1,56.55 35.75,56.55 36.4,56.55 37.05,56.55 37.7,56.55 38.35,56.55 39,56.55 39.65,56.55 41.6,56.55 46.15,56.55 46.8,56.55 53.95,56.55 65,56.55 65.65,56.55 66.3,56.55 66.95,56.55 67.6,56.55 15.275,57.2 15.925,57.2 16.575,57.2 17.225,57.2 17.875,57.2 18.525,57.2 19.175,57.2 19.825,57.2 20.475,57.2 23.075,57.2 23.725,57.2 24.375,57.2 25.025,57.2 27.625,57.2 30.225,57.2 30.875,57.2 31.525,57.2 46.475,57.2 64.675,57.2 65.325,57.2 65.975,57.2 66.625,57.2 15.6,57.85 16.25,57.85 16.9,57.85 17.55,57.85 18.2,57.85 18.85,57.85 19.5,57.85 20.15,57.85 20.8,57.85 21.45,57.85 23.4,57.85 27.3,57.85 27.95,57.85 31.2,57.85 33.15,57.85 33.8,57.85 34.45,57.85 35.1,57.85 35.75,57.85 36.4,57.85 54.6,57.85 55.25,57.85 55.9,57.85 56.55,57.85 63.7,57.85 64.35,57.85 65,57.85 65.65,57.85 66.3,57.85 16.575,58.5 17.225,58.5 17.875,58.5 18.525,58.5 19.175,58.5 19.825,58.5 20.475,58.5 21.125,58.5 21.775,58.5 26.975,58.5 27.625,58.5 28.275,58.5 32.825,58.5 33.475,58.5 34.125,58.5 34.775,58.5 35.425,58.5 36.075,58.5 36.725,58.5 59.475,58.5 60.125,58.5 60.775,58.5 61.425,58.5 62.075,58.5 62.725,58.5 63.375,58.5 64.025,58.5 64.675,58.5 65.325,58.5 65.975,58.5 16.9,59.15 17.55,59.15 18.2,59.15 18.85,59.15 19.5,59.15 20.15,59.15 20.8,59.15 21.45,59.15 22.1,59.15 22.75,59.15 26.65,59.15 27.3,59.15 27.95,59.15 28.6,59.15 29.25,59.15 33.15,59.15 33.8,59.15 34.45,59.15 35.1,59.15 35.75,59.15 36.4,59.15 37.05,59.15 37.7,59.15 38.35,59.15 39.65,59.15 41.6,59.15 42.25,59.15 42.9,59.15 43.55,59.15 44.2,59.15 53.95,59.15 59.15,59.15 59.8,59.15 60.45,59.15 61.1,59.15 61.75,59.15 62.4,59.15 63.05,59.15 63.7,59.15 64.35,59.15 65,59.15 17.875,59.8 18.525,59.8 19.175,59.8 19.825,59.8 20.475,59.8 21.125,59.8 21.775,59.8 22.425,59.8 23.075,59.8 32.825,59.8 33.475,59.8 34.125,59.8 34.775,59.8 35.425,59.8 36.075,59.8 36.725,59.8 37.375,59.8 38.025,59.8 39.975,59.8 41.275,59.8 41.925,59.8 42.575,59.8 43.225,59.8 45.825,59.8 47.775,59.8 48.425,59.8 52.325,59.8 52.975,59.8 53.625,59.8 58.825,59.8 59.475,59.8 60.125,59.8 60.775,59.8 61.425,59.8 62.075,59.8 62.725,59.8 63.375,59.8 64.025,59.8 64.675,59.8 18.2,60.45 18.85,60.45 19.5,60.45 20.15,60.45 20.8,60.45 21.45,60.45 22.1,60.45 22.75,60.45 23.4,60.45 24.05,60.45 26,60.45 26.65,60.45 27.3,60.45 27.95,60.45 28.6,60.45 29.25,60.45 29.9,60.45 30.55,60.45 33.15,60.45 33.8,60.45 34.45,60.45 35.1,60.45 35.75,60.45 36.4,60.45 37.05,60.45 37.7,60.45 38.35,60.45 39.65,60.45 41.6,60.45 42.25,60.45 42.9,60.45 47.45,60.45 48.1,60.45 48.75,60.45 49.4,60.45 50.05,60.45 50.7,60.45 52.65,60.45 53.3,60.45 53.95,60.45 54.6,60.45 55.25,60.45 55.9,60.45 57.85,60.45 58.5,60.45 59.15,60.45 59.8,60.45 60.45,60.45 61.1,60.45 61.75,60.45 62.4,60.45 63.05,60.45 63.7,60.45 19.175,61.1 19.825,61.1 20.475,61.1 21.125,61.1 21.775,61.1 22.425,61.1 23.075,61.1 23.725,61.1 24.375,61.1 26.325,61.1 26.975,61.1 27.625,61.1 28.275,61.1 28.925,61.1 29.575,61.1 30.225,61.1 32.825,61.1 33.475,61.1 34.125,61.1 34.775,61.1 35.425,61.1 36.075,61.1 36.725,61.1 38.025,61.1 39.975,61.1 41.275,61.1 52.975,61.1 53.625,61.1 54.275,61.1 54.925,61.1 57.525,61.1 58.175,61.1 58.825,61.1 59.475,61.1 60.125,61.1 60.775,61.1 61.425,61.1 62.075,61.1 62.725,61.1 20.15,61.75 20.8,61.75 21.45,61.75 22.1,61.75 22.75,61.75 23.4,61.75 24.05,61.75 24.7,61.75 25.35,61.75 27.3,61.75 27.95,61.75 28.6,61.75 29.25,61.75 29.9,61.75 30.55,61.75 32.5,61.75 33.15,61.75 33.8,61.75 34.45,61.75 35.1,61.75 35.75,61.75 36.4,61.75 46.8,61.75 47.45,61.75 48.1,61.75 48.75,61.75 49.4,61.75 50.05,61.75 52.65,61.75 53.3,61.75 53.95,61.75 54.6,61.75 56.55,61.75 57.2,61.75 57.85,61.75 58.5,61.75 59.15,61.75 59.8,61.75 60.45,61.75 61.1,61.75 61.75,61.75 62.4,61.75 21.125,62.4 21.775,62.4 22.425,62.4 23.075,62.4 23.725,62.4 24.375,62.4 25.025,62.4 25.675,62.4 27.625,62.4 28.275,62.4 28.925,62.4 29.575,62.4 30.225,62.4 32.825,62.4 33.475,62.4 34.125,62.4 34.775,62.4 35.425,62.4 36.075,62.4 36.725,62.4 46.475,62.4 47.125,62.4 47.775,62.4 48.425,62.4 49.075,62.4 49.725,62.4 51.675,62.4 52.325,62.4 52.975,62.4 53.625,62.4 56.225,62.4 56.875,62.4 57.525,62.4 58.175,62.4 58.825,62.4 59.475,62.4 60.125,62.4 60.775,62.4 61.425,62.4 21.45,63.05 22.1,63.05 22.75,63.05 23.4,63.05 24.05,63.05 24.7,63.05 25.35,63.05 26,63.05 26.65,63.05 28.6,63.05 29.25,63.05 29.9,63.05 30.55,63.05 33.15,63.05 33.8,63.05 34.45,63.05 35.1,63.05 35.75,63.05 36.4,63.05 37.05,63.05 37.7,63.05 38.35,63.05 39.65,63.05 41.6,63.05 42.25,63.05 42.9,63.05 43.55,63.05 44.2,63.05 46.8,63.05 47.45,63.05 48.1,63.05 48.75,63.05 50.7,63.05 51.35,63.05 52,63.05 52.65,63.05 53.3,63.05 55.25,63.05 55.9,63.05 56.55,63.05 57.2,63.05 57.85,63.05 58.5,63.05 59.15,63.05 59.8,63.05 60.45,63.05 22.425,63.7 23.075,63.7 23.725,63.7 24.375,63.7 25.025,63.7 25.675,63.7 26.325,63.7 26.975,63.7 28.925,63.7 29.575,63.7 30.225,63.7 30.875,63.7 31.525,63.7 32.175,63.7 32.825,63.7 33.475,63.7 34.125,63.7 34.775,63.7 35.425,63.7 36.075,63.7 36.725,63.7 37.375,63.7 38.025,63.7 39.975,63.7 41.275,63.7 41.925,63.7 42.575,63.7 43.225,63.7 43.875,63.7 44.525,63.7 46.475,63.7 47.125,63.7 47.775,63.7 48.425,63.7 50.375,63.7 51.025,63.7 51.675,63.7 52.325,63.7 54.925,63.7 55.575,63.7 56.225,63.7 56.875,63.7 57.525,63.7 58.175,63.7 58.825,63.7 59.475,63.7 23.4,64.35 24.05,64.35 24.7,64.35 25.35,64.35 26,64.35 26.65,64.35 27.3,64.35 27.95,64.35 29.9,64.35 30.55,64.35 31.2,64.35 31.85,64.35 32.5,64.35 33.15,64.35 33.8,64.35 34.45,64.35 35.1,64.35 35.75,64.35 36.4,64.35 37.05,64.35 37.7,64.35 38.35,64.35 39.65,64.35 41.6,64.35 42.25,64.35 42.9,64.35 43.55,64.35 44.2,64.35 46.8,64.35 47.45,64.35 49.4,64.35 50.05,64.35 55.25,64.35 55.9,64.35 56.55,64.35 57.2,64.35 57.85,64.35 58.5,64.35 25.025,65 25.675,65 26.325,65 26.975,65 27.625,65 28.275,65 30.225,65 30.875,65 31.525,65 32.175,65 32.825,65 33.475,65 34.125,65 34.775,65 35.425,65 36.075,65 36.725,65 37.375,65 38.025,65 39.975,65 41.275,65 41.925,65 42.575,65 43.225,65 43.875,65 44.525,65 46.475,65 47.125,65 49.075,65 49.725,65 54.925,65 55.575,65 56.225,65 56.875,65 57.525,65 26,65.65 26.65,65.65 27.3,65.65 27.95,65.65 28.6,65.65 29.25,65.65 31.2,65.65 31.85,65.65 32.5,65.65 33.15,65.65 33.8,65.65 34.45,65.65 35.1,65.65 35.75,65.65 36.4,65.65 48.1,65.65 48.75,65.65 49.4,65.65 50.05,65.65 55.25,65.65 55.9,65.65 27.625,66.3 28.275,66.3 28.925,66.3 29.575,66.3 31.525,66.3 32.175,66.3 32.825,66.3 33.475,66.3 34.125,66.3 34.775,66.3 35.425,66.3 36.075,66.3 47.775,66.3 48.425,66.3 49.075,66.3 49.725,66.3 50.375,66.3 51.025,66.3 51.675,66.3 52.325,66.3 52.975,66.3 53.625,66.3 54.275,66.3 54.925,66.3 29.25,66.95 29.9,66.95 30.55,66.95 46.8,66.95 47.45,66.95 48.1,66.95 48.75,66.95 49.4,66.95 50.05,66.95 50.7,66.95 51.35,66.95 52,66.95 52.65,66.95 53.3,66.95 30.875,67.6 31.525,67.6 32.175,67.6 32.825,67.6 33.475,67.6 34.125,67.6 34.775,67.6 35.425,67.6 36.075,67.6 36.725,67.6 37.375,67.6 38.025,67.6 38.675,67.6 39.325,67.6 39.975,67.6 40.625,67.6 41.275,67.6 41.925,67.6 42.575,67.6 43.225,67.6 43.875,67.6 44.525,67.6 45.175,67.6 45.825,67.6 46.475,67.6 47.125,67.6 47.775,67.6 48.425,67.6 49.075,67.6 49.725,67.6 50.375,67.6 51.025,67.6 33.15,68.25 33.8,68.25 34.45,68.25 35.1,68.25 35.75,68.25 36.4,68.25 37.05,68.25 37.7,68.25 38.35,68.25 39,68.25 39.65,68.25 40.3,68.25 40.95,68.25 41.6,68.25 42.25,68.25 42.9,68.25 43.55,68.25 44.2,68.25 44.85,68.25 45.5,68.25 46.15,68.25 46.8,68.25 47.45,68.25 48.1,68.25 48.75,68.25 49.4,68.25 34.125,68.9 34.775,68.9 35.425,68.9 36.075,68.9 36.725,68.9 37.375,68.9 38.025,68.9 38.675,68.9 39.325,68.9 39.975,68.9 40.625,68.9 41.275,68.9 41.925,68.9 42.575,68.9 43.225,68.9 43.875,68.9 44.525,68.9 45.175,68.9 45.825,68.9 46.475,68.9 47.125,68.9 47.775,68.9 35.1,69.55 35.75,69.55 36.4,69.55 37.05,69.55 37.7,69.55 38.35,69.55 39,69.55 39.65,69.55 40.3,69.55 40.95,69.55 41.6,69.55 42.25,69.55 42.9,69.55 43.55,69.55 44.2,69.55 44.85,69.55 45.5,69.55 46.15,69.55 46.8,69.55 47.45,69.55 35.425,70.2 36.075,70.2 36.725,70.2 37.375,70.2 38.025,70.2 38.675,70.2 39.325,70.2 39.975,70.2 40.625,70.2 41.275,70.2 41.925,70.2 42.575,70.2 43.225,70.2 43.875,70.2 44.525,70.2 45.175,70.2 45.825,70.2 46.475,70.2 35.75,70.85 36.4,70.85 37.05,70.85 37.7,70.85 38.35,70.85 39,70.85 42.9,70.85 43.55,70.85 44.2,70.85 44.85,70.85 45.5,70.85 46.15,70.85 36.075,71.5 36.725,71.5 37.375,71.5 38.025,71.5 44.525,71.5 45.175,71.5 45.825,71.5 46.475,71.5 36.4,72.15 37.05,72.15 44.85,72.15 45.5,72.15 46.15,72.15 36.075,72.8 36.725,72.8 45.825,72.8 36.4,73.45 46.15,73.45 36.075,74.1 45.825,74.1 46.15,74.75 36.075,75.4 46.15,76.05 36.075,76.7 36.4,77.35 36.725,78 37.05,78.65 44.525,79.3 38.35,79.95 43.55,79.95 39.975,80.6 40.625,80.6 41.275,80.6 41.925,80.6
LAMP1: DRV2.3 LAMP1.2 | length 15.4
  Top Layer w0.508: DRV2.3@39.912,43.583 44.004,43.583 44.653,44.232 45.665,44.232 46.212,44.779 46.212,45.321 45.866,45.667 45.866,45.774 45.065,46.576 45.065,47.737 43.7,49.102 LAMP1.2@43.7,52.382
LAMP2: DRV2.10 LAMP2.2 | length 16.9
  Top Layer w0.508: LAMP2.2@31,52.382 31,52.569 31.492,53.061 31.492,53.077 31.753,53.338 33.247,53.338 34.298,52.287 34.298,51.997 35.641,50.654 41.217,50.654 42.143,49.728 42.143,48.57 41.706,48.133 DRV2.10@39.912,48.133
NetACT_2: ACT.2 R19.2 | length 1.7
  Top Layer w0.102: R19.2@59.588,22.682 59.633,22.682 59.714,22.602 59.714,22.063 59.82,21.957 ACT.2@59.82,21.069
NetBATMON_TH_1: BATMON_TH.1 U5.1 | length 2.3
  Top Layer w0.127: U5.1@25.986,25.191 26.236,25.191 26.273,25.154 26.273,24.545 26.456,24.362 BATMON_TH.1@26.456,23.217
NetBATT_2: BATT.2 R22.2 | length 1.7
  Top Layer w0.102: R22.2@59.69,35.814 59.69,34.923 59.82,34.792 BATT.2@59.82,34.15
NetBUTTON_PWR_1: BUTTON_PWR.1 U1.28 | length 24.2
  Top Layer w0.102: BUTTON_PWR.1@52.578,6.35 56.063,9.835 56.25,9.835 56.522,10.107 56.81,10.107 57.018,10.316 57.018,10.603 59.186,12.771 59.186,18.73 60.426,19.97 60.426,20.372 60.88,20.827 60.88,22.93 61.01,23.06 61.01,25.163 61.735,25.888 U1.28@62.332,25.888
NetC8_2: C8.2 C10.2 C12.1 C13.1 U4.29 | length 6.5
  Top Layer w0.203: U4.29@24.547,15.674 24.549,15.672 24.549,15.301 24.664,15.186 ; C13.1@24.923,14.136 24.664,14.395 24.664,15.186 ; 29.083,14.766 28.067,14.766 27.051,14.766 26.808,14.523 25.315,14.523 24.694,15.144 24.694,15.155 24.664,15.186
NetC19_1: C19.1 U4.24 | length 1.3
  Top Layer w0.127: C19.1@20.955,15.772 20.959,15.768 U4.24@22.266,15.768
NetC23_2: C23.2 C24.1 U5.6 U6.3 | length 16.2
  Top Layer w0.102: U6.3@22.291,24.056 22.291,23.781 22.876,23.196 25.217,23.196 25.527,22.885 25.527,21.582 26.144,20.965 26.767,20.965 27.564,21.761 27.564,26.223 26.596,27.191 U5.6@25.986,27.191
  Top Layer w0.127: C23.2@21.336,22.556 21.937,22.556 22.291,22.91 U6.3@22.291,23.781
NetC25_1: C25.1 L3.1 PS1.2 | length 4.6
  Top Layer w0.102: PS1.2@37.719,13.188 37.719,12.863 38.289,12.293 C25.1@39.624,12.293
  Top Layer w0.635: PS1.2@37.719,13.188 L3.1@37.719,15.367
NetC25_2: C25.2 PS1.6 | length 1.6
  Top Layer w0.102: PS1.6@38.669,10.688 38.669,11.013 38.918,11.262 39.248,11.262 39.624,11.638 C25.2@39.624,11.684
NetC26_2: C26.2 C27.2 U5.11 | length 2
  Top Layer w0.102: 21.336,26.545 21.338,26.543 21.793,26.543 21.793,26.589 21.924,26.72 21.969,26.72 21.996,26.746 22.415,26.746 22.623,26.538 22.677,26.538 22.737,26.479 22.737,26.44 22.786,26.391 U5.11@23.036,26.391
NetC52_1: C52.1 L2.1 U3.6 | length 4.8
  Top Layer w0.102: U3.6@32.597,6.231 32.597,7.466 33.03,7.899 33.091,7.899 33.274,8.082 C52.1@33.274,8.128
  Top Layer w0.254: L2.1@34.409,6.231 L2.1@34.925,5.715
  Top Layer w0.508: U3.6@32.597,6.231 L2.1@34.409,6.231
NetC52_2: C52.2 U3.7 | length 0.9
  Top Layer w0.102: U3.7@33.147,6.731 33.2,6.731 33.274,6.805 C52.2@33.274,7.519
NetCON_RPI_8: CON_RPI.8 RPI_UART.1 | length 16.9
  Top Layer w0.102: RPI_UART.1@53.824,64.966 53.824,63.756 58.033,59.548 58.033,52.831 56.815,51.613 CON_RPI.8@55.512,51.613
NetCON_RPI_10: CON_RPI.10 RPI_UART.2 | length 21.5
  Top Layer w0.102: RPI_UART.2@52.324,64.966 57.429,59.861 57.431,59.861 57.829,59.463 57.829,58.901 57.601,58.672 57.601,57.152 57.829,56.923 57.829,56.361 57.601,56.132 57.601,54.366 56.511,53.276 55.3,53.276 54.21,52.186 54.21,51.04 54.85,50.4 55.453,50.4 55.512,50.34 CON_RPI.10@55.512,49.073
NetFB1_1: FB1.1 U1.9 | length 1.2
  Top Layer w0.127: U1.9@70.764,25.888 71.978,25.888 FB1.1@71.998,25.908
NetLED_CHG_1: LED_CHG.1 U4.1 | length 23.1
  Top Layer w0.127: LED_CHG.1@18.522,13.153 19.462,12.213 19.462,8.732 20.066,8.128 27.533,8.128 28.194,8.789 28.194,13.208 27.742,13.66 v1(26.924,13.66) ; U4.1@25.016,15.768 25.283,15.501 25.453,15.501 25.592,15.362 25.592,15.087 v1(25.654,15.025)
  Bottom Layer w0.127: v1(25.654,15.025) 25.987,14.692 25.987,14.597 26.258,14.326 26.512,14.326 26.712,14.126 26.712,13.959 26.924,13.747 v1(26.924,13.66)
NetLED_CHG_2: LED_CHG.2 R1.2 | length 1.6
  Top Layer w0.127: LED_CHG.2@18.529,11.554 18.796,11.287 R1.2@18.796,10.033
NetPS1_4: PS1.4 R5.2 R27.1 | length 2.7
  Top Layer w0.127: R27.1@34.798,11.767 35.485,11.767 R5.2@35.56,11.842 36.153,11.249 36.532,11.249 36.769,11.013 PS1.4@36.769,10.688
NetR2_1: R2.1 U4.20 | length 2.6
  Top Layer w0.102: R2.1@20.536,18.144 20.498,18.105 20.498,17.752 20.482,17.736 20.482,17.109 20.571,17.02 21.198,17.02 21.216,17.02 21.295,17.099 21.295,17.133 21.306,17.143 21.306,17.339 21.365,17.398 U4.20@21.747,17.399
NetR6_1: R6.1 R7.2 | length 0.6
  Top Layer w0.127: R7.2@21.002,25.945 21.002,25.367 R6.1@21.048,25.321
NetR7_1: R7.1 R8.2 U5.10 | length 4.4
  Top Layer w0.102: R7.1@21.002,26.545 21.002,26.875 20.631,27.245 20.631,27.619 20.997,27.985 21.695,27.985 21.82,27.861 21.82,27.811 22.093,27.537 22.184,27.537 22.403,27.318 22.403,27.158 22.623,26.938 22.677,26.938 22.737,26.879 22.737,26.84 22.786,26.791 U5.10@23.036,26.791
NetR15_2: R15.2 R24.1 U3.2 | length 3
  Top Layer w0.102: R15.2@29.211,3.175 29.996,3.175 30.181,3.36 30.382,3.538 30.411,3.564 30.871,3.564 31.185,3.877 31.185,3.974 31.497,4.286 U3.2@31.497,4.461
NetR18_2: R18.2 REGPI.2 | length 1.8
  Top Layer w0.102: R18.2@59.562,25.908 59.608,25.908 59.689,25.827 59.689,25.48 59.887,25.282 59.887,24.908 59.82,24.842 REGPI.2@59.82,24.295
NetR20_2: R20.2 REG5.2 | length 1.7
  Top Layer w0.102: R20.2@59.791,29.185 59.82,29.156 REG5.2@59.82,27.546
NetR21_2: R21.2 REG12.2 | length 1.8
  Top Layer w0.102: R21.2@59.563,32.512 59.608,32.512 59.689,32.431 59.689,31.855 59.82,31.723 REG12.2@59.82,30.798
NetU4_8: U4.8 U4.9 | length 0.9
  Top Layer w0.102: U4.9@25.06,19.162 25.348,18.873 25.348,18.648 25.397,18.599 U4.8@25.547,18.599
PACK+: BAT.1 C20.2 C21.2 C22.2 C30.2 R4.2 R6.2 U2.2 U4.22 U4.23 U6.2 | length 27.6
  Top Layer w0.254: R6.2@21.075,24.507 21.062,24.495 21.062,23.896 v1(21.082,23.876) ; R6.2@21.154,24.507 21.484,24.507 21.515,24.538 21.561,24.538 21.615,24.593 C20.2@21.615,24.638 ; v1(30.988,13.97) 30.988,13.917 31.28,13.625 C30.2@31.28,13.451 ; U2.2@31.369,12.397 31.382,12.41 31.382,13.322 C30.2@31.395,13.335
  Bottom Layer w0.102: v1(15.494,16.002) 15.418,15.926 15.288,15.926 14.027,14.665 14.027,14.291 14.291,14.027 16.24,14.027 19.67,17.457 20.043,17.457 21.752,15.748 26.016,15.748 cw(c26.197,15.335) 26.197,15.786 27.558,15.786 29.374,13.97 v1(30.988,13.97)
  Bottom Layer w0.254: v1(21.082,23.876) 22.657,23.876 22.733,23.952 23.209,23.952 23.413,24.156 v1(23.466,24.156)
  other v1: 16.256,16.002 17.018,16.002 14.95,16.25 22.606,16.764 22.678,17.454 23.359,17.523 15.6,20.15 16.25,20.15 16.9,20.15 15.275,20.8 15.925,20.8 16.575,20.8 17.225,20.8 16.9,21.45 17.225,23.4
PACK-: BAT.2 BATMON_TH.2 C20.1 C23.1 C24.2 C26.1 C27.1 R8.1 R9.2 U5.8 U5.9 U5.15 U6.1 | length 38.9
  Top Layer w0.254: v1(21.082,27.432) 21.149,27.432 21.323,27.257 21.472,27.257 21.526,27.203 C27.1@21.526,27.157 21.526,27.14 21.781,27.14 C26.1@21.793,27.152 ; C20.1@21.615,25.247 21.67,25.301 21.67,25.775 21.736,25.841 v1(21.736,25.907) ; R9.2@21.807,29.534 21.992,29.718 22.887,29.718 23.036,29.569 U5.8@23.036,27.591 U5.9@23.036,27.191 ; BATMON_TH.2@26.456,21.717 26.479,21.717 27.284,22.522 27.284,25.548 v1(26.822,26.01) 26.822,26.076 26.724,26.174 26.724,26.438 C24.2@26.67,26.493
  Top Layer w0.305: v1(20.828,23.114) 20.853,23.139 21.311,23.139 C23.1@21.336,23.164
  Top Layer w0.635: v1(20.828,28.448) 21.043,28.663 21.484,28.663 21.807,28.987 R9.2@21.807,29.534 ; v1(20.828,29.21) 21.484,29.21 R9.2@21.807,29.534 ; v1(20.828,29.972) 21.706,29.972 R9.2@21.807,30.074 ; v1(20.828,30.734) 21.484,30.734 R9.2@21.807,30.41 ; v1(20.828,31.496) 20.84,31.484 21.484,31.484 21.807,31.16 R9.2@21.807,30.41 ; R9.2@21.807,29.534 R9.2@21.807,30.074 ; R9.2@21.807,30.074 R9.2@21.807,30.41
  Bottom Layer w0.305: v1(20.828,23.114) 19.111,24.831 19.111,25.653 17.498,27.266 16.295,27.266 BAT.2@16.002,27.559 18.175,27.559 21.274,24.46 22.988,24.46 24.538,26.01 v1(26.822,26.01)
  other v1: 15.275,26 15.925,26 16.575,26 17.225,26 17.875,26 18.525,26 19.175,26 19.825,26 17.55,26.65 18.2,26.65 18.85,26.65 19.5,26.65 20.15,26.65 17.875,27.3 18.525,27.3 19.175,27.3 19.825,27.3 17.55,27.95 18.2,27.95 18.85,27.95 19.5,27.95 20.15,27.95 24.05,27.95 17.225,28.6 17.875,28.6 18.525,28.6 19.175,28.6 19.825,28.6 23.075,28.6 23.725,28.6 24.375,28.6 23.4,29.25 24.05,29.25 24.7,29.25 23.075,29.9 23.725,29.9 24.375,29.9 23.4,30.55 23.075,31.2
POSITION_AX_INT: CON_RPI.15 POSITION.3 | length 21.2
  Top Layer w0.102: v1(42.875,56.362) 43.357,55.88 v1(44.196,55.88) ; v1(48.935,42.88) 48.912,42.88 48.621,42.588 48.621,42.481 48.544,42.404 48.544,42.282 49.373,41.453 CON_RPI.15@50.013,41.453
  Bottom Layer w0.102: POSITION.3@42.116,57.912 42.249,57.779 42.249,57.065 42.875,56.439 v1(42.875,56.362) ; v1(44.196,55.88) 48.26,51.816 48.26,45.375 48.049,45.164 48.049,44.622 48.26,44.412 48.26,43.343 48.436,43.167 48.659,43.167 48.935,42.89 v1(48.935,42.88)
POSITION_MAG_INT: CON_RPI.13 POSITION.2 | length 18
  Top Layer w0.127: v1(43.434,56.642) 43.733,56.343 45.257,56.343 v1(45.974,55.626) ; v1(48.703,44.893) 48.765,44.831 48.765,44.6 49.373,43.993 CON_RPI.13@50.013,43.993
  Bottom Layer w0.127: v1(43.434,56.642) 43.434,56.729 43.616,56.911 POSITION.2@43.616,57.912 ; v1(45.974,55.626) 48.768,52.832 48.768,45.372 48.704,45.309 v1(48.703,44.893) v1(48.703,44.893)